# Altium PCB PCB1.PcbDoc
Units mm, origin at the board's own origin, x right, y up, seen from the top; angles counter-clockwise.
Board outline 30.4 x 31.22 mm, 2 copper layers (Top Layer, Bottom Layer); 47 components, 33 nets, 158 pads, 139 vias.
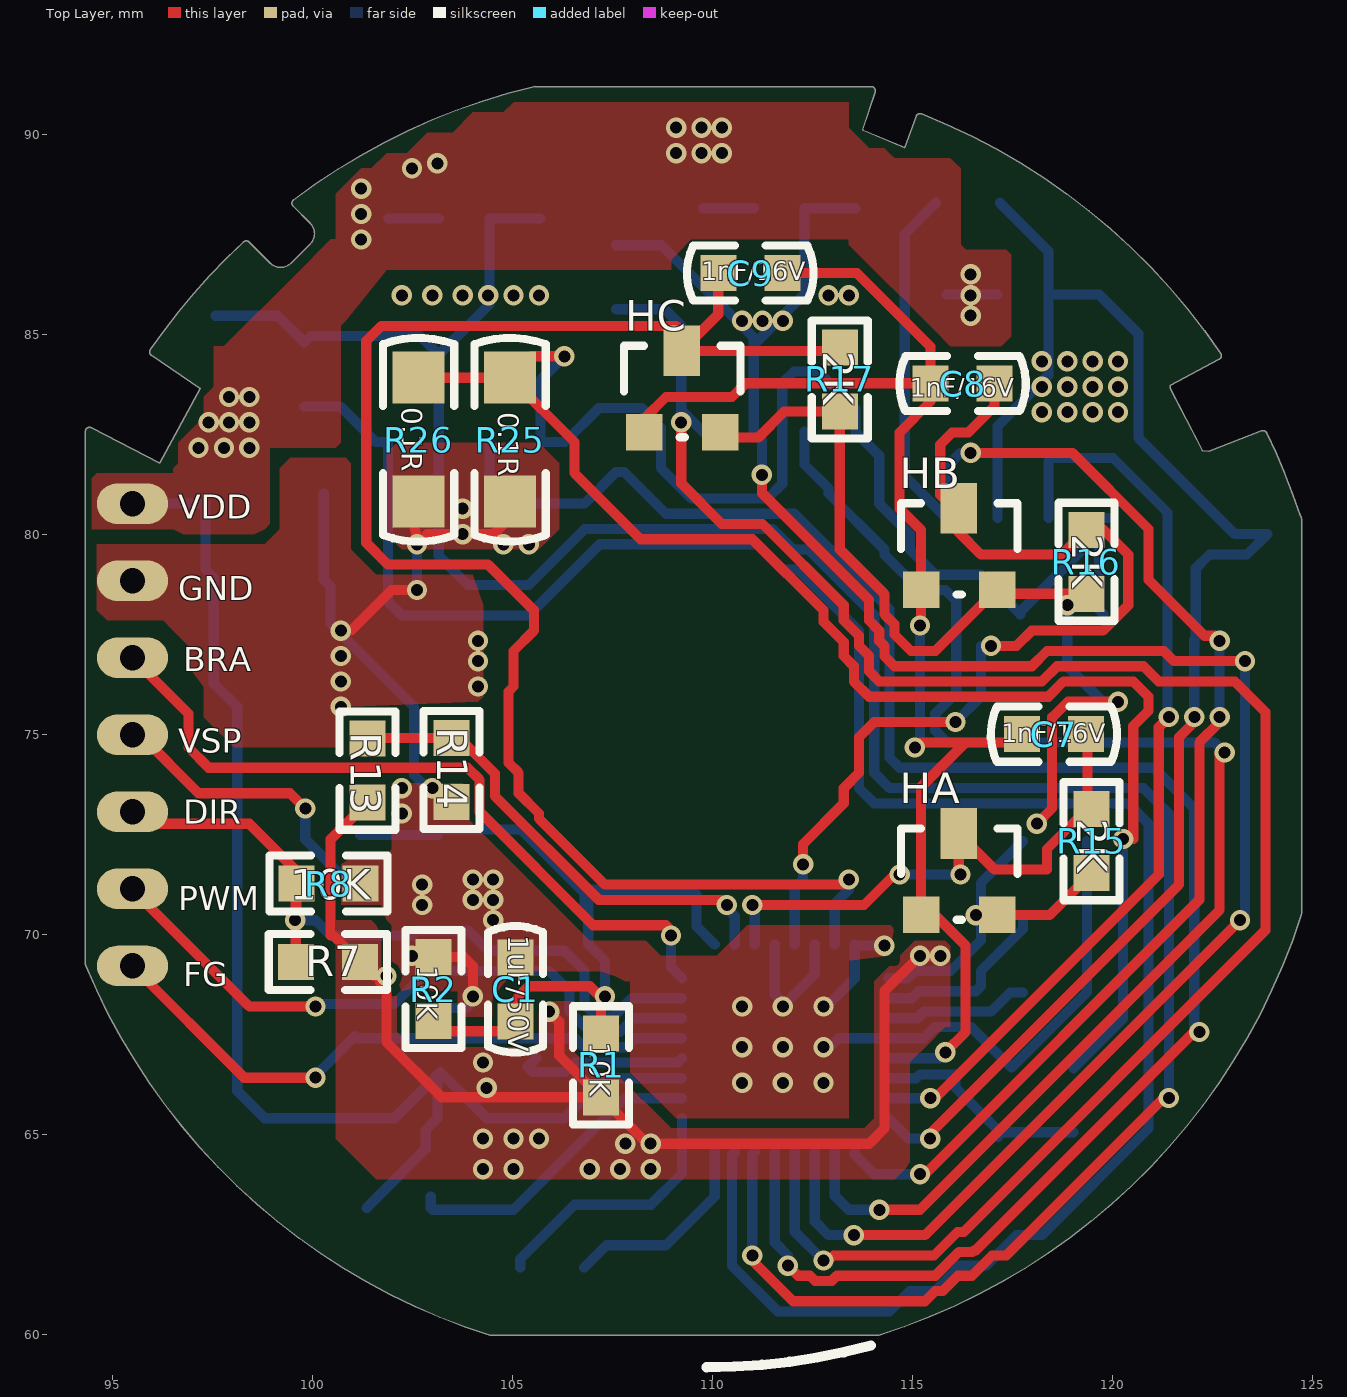
[diagram p0: Top Layer view]
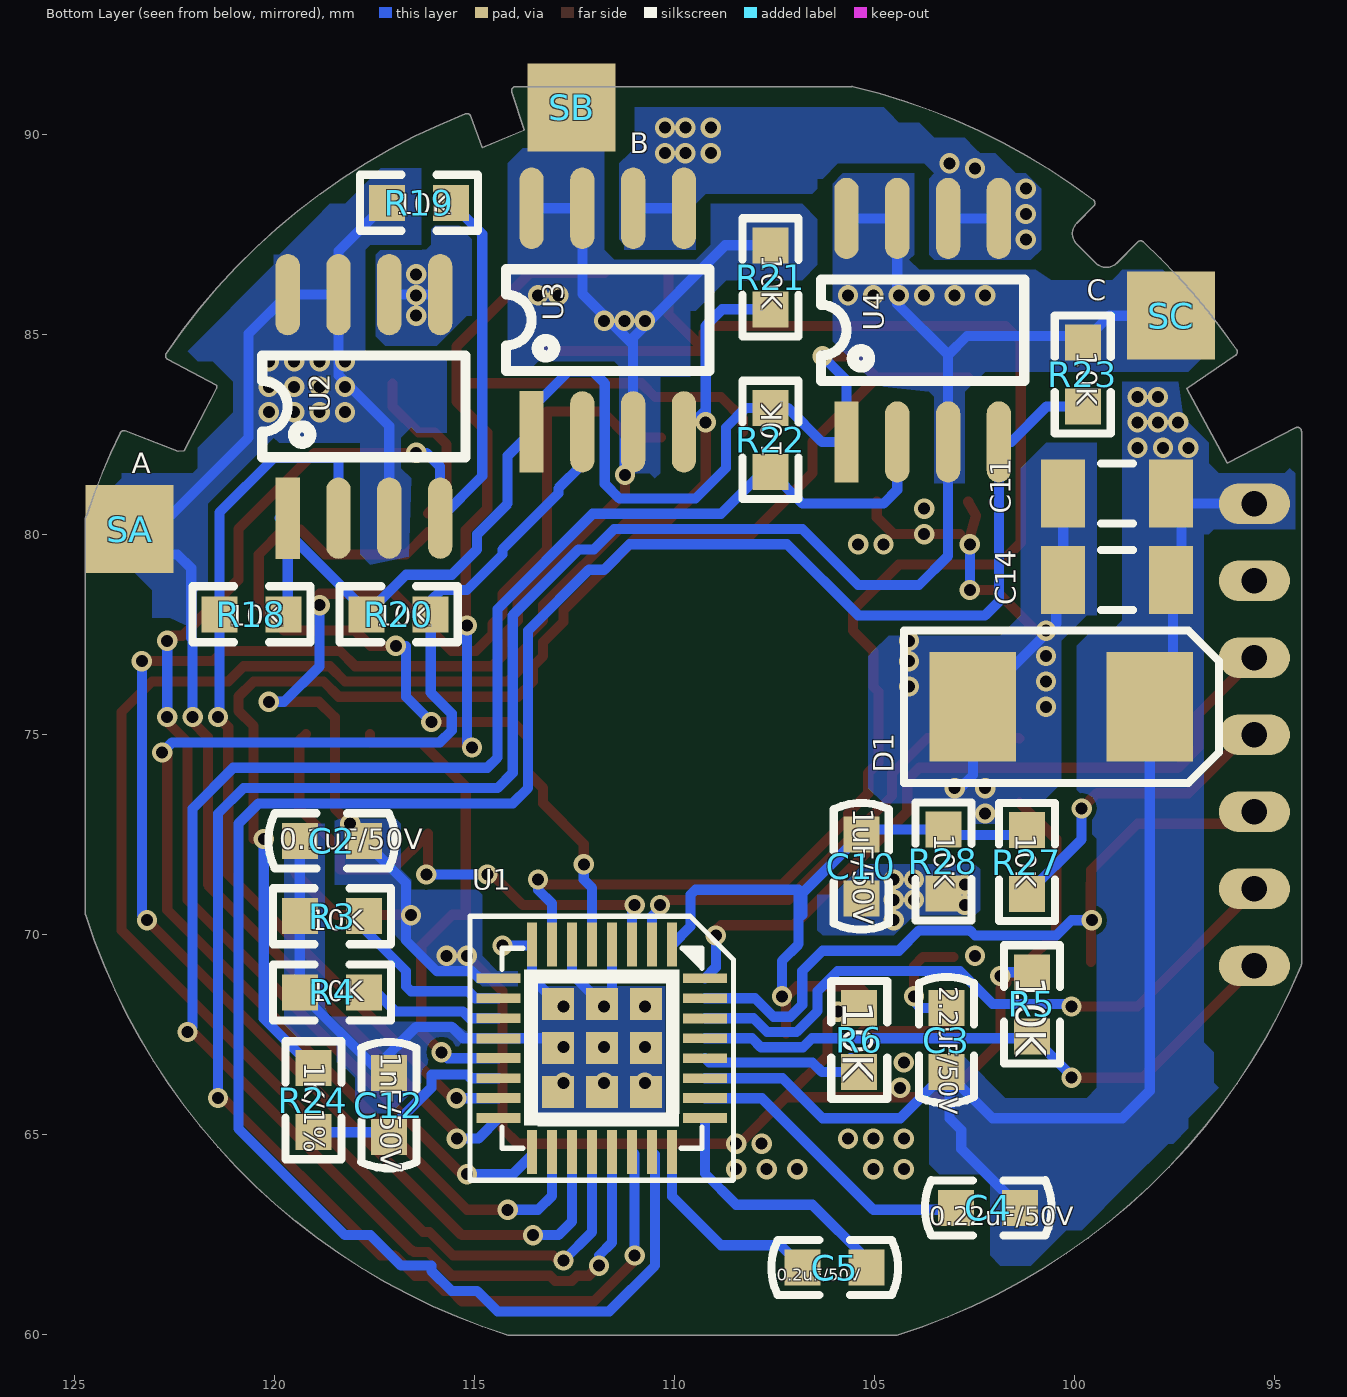
[diagram p1: Bottom Layer view, seen from below]

## Layer stack, top to bottom
Top Solder: solder mask 0.0102, Solder Resist, Dk 3.5
Top Layer: signal copper 0.0356
Dielectric 1: dielectric 0.32, FR-4, Dk 4.8
Bottom Layer: signal copper 0.0356
Bottom Solder: solder mask 0.0102, Solder Resist, Dk 3.5

## Board outline
94.333,69.224 cw(c94.428,69.263) 94.326,69.263 94.326,82.578 cw(c94.428,82.578) 94.475,82.669 94.474,82.669 94.475,82.669 96.186,81.785 97.199,83.648 95.975,84.48 cw(c96.032,84.564) 95.948,84.622 cw(c109.296,75.438) 98.276,87.315 cw(c98.345,87.24) 98.423,87.306 98.945,86.784 ccw(c98.873,86.712) 98.945,86.784 ccw(c99.206,87.044) 99.466,86.784 99.945,87.263 ccw(c100.017,87.191) 99.945,87.263 ccw(c99.685,87.523) 100.053,87.523 ccw(c99.685,87.523) 99.945,87.783 cw(c100.017,87.856) 99.945,87.784 99.945,87.783 99.518,88.211 cw(c99.59,88.283) 99.528,88.364 cw(c109.296,75.438) 105.538,91.198 cw(c105.562,91.099) 105.581,91.199 113.97,91.199 cw(c113.97,91.097) 114.072,91.097 cw(c113.97,91.097) 114.067,91.065 113.753,90.113 114.812,89.671 115.092,90.455 cw(c115.188,90.421) 115.226,90.516 cw(c109.296,75.438) 122.708,84.529 cw(c122.623,84.471) 122.725,84.471 cw(c122.623,84.471) 122.671,84.381 121.45,83.733 121.45,83.654 122.252,82.1 122.414,82.082 123.73,82.59 cw(c123.767,82.495) 123.859,82.54 cw(c109.296,75.438) 124.696,80.473 cw(c124.626,80.399) 124.728,80.399 124.728,70.518 ccw(c124.626,70.518) 124.728,70.52 124.728,70.518 cw(c124.626,70.518) 124.723,70.487 cw(c109.296,75.438) 114.164,59.985 cw(c114.133,60.082) 114.133,59.98 104.494,59.98 cw(c104.469,60.079) 104.439,59.981 cw(c109.296,75.438)

## Design rules (kind name [scope] priority, off if disabled: settings)
Clearance [All] p1: gap=0.127
PolygonConnect [All] p1: connectstyle=Direct reliefconductorwidth=0.254 reliefentries=4 polygonreliefangle="90 Angle" airgapwidth=0.254
RoutingVias [All] p1: holewidth=0.711 width=1.27 viastyle="Through Hole" minholewidth=0.711 minwidth=1.27 maxholewidth=0.711 maxwidth=1.27
SilkToSilkClearance [All] p1: silktosilkclearance=0.051
SolderMaskExpansion [All] p1: expansion=0.102
Width [All] p1: maxlimit=0.254 minlimit=0.254 preferedwidth=0.254
29 further rules are at their usual default settings.

## Components (designator, comment, footprint, x,y, rotation, side; value= is the part's Value field where it differs from the comment)
C1 "1uF/50V" C0603 101.981,68.326 r180 top
C2 "0.1uF/50V" C0603 118.872,75.438 r90 bottom
C3 "2.2uF/50V" C0603 106.299,67.056 r0 bottom
C4 "0.22uF/50V" C0603 101.854,60.071 r270 bottom
C5 "0.2uF/50V" C0603 106.299,64.77 r90 bottom
C7 "1nF/16V" C0603 118.237,78.105 r90 top
C8 "1nF/16V" C0603 115.951,86.868 r90 top
C9 "1nF/16V" C0603 111.252,83.439 r270 top
C10 "1uF/50V" C0603 102.235,72.009 r180 bottom
C11 "22uF/25V" C1206 98.933,81.026 r180 bottom
C12 "1nF/50V" C0603 114.046,66.04 r180 bottom
C14 "22uF/25V" C1206 98.933,78.867 r180 bottom
D1 "24V/Zener" SMB 100.33,75.692 r180 bottom
HA "HALL_SOT23-3" SOT-23 119.507,70.866 r0 top locked
HB "HALL_SOT23-3" SOT-23 119.507,78.994 r0 top locked
HC "HALL_SOT23-3" SOT-23 112.582,82.931 r0 top locked
R1 "10K" R0603 105.537,65.278 r180 top
R2 "10K" R0603 101.346,67.183 r180 top
R3 "10K" R0603 120.015,72.136 r90 bottom
R4 "10K" R0603 120.015,70.231 r90 bottom
R5 "10K" R0603 102.743,66.802 r0 bottom
R6 "10K" R0603 107.061,65.913 r0 bottom
R7 "" R0603 98.933,70.993 r90 top
R8 "10K" R0603 101.854,69.596 r270 top
R13 "" R0603 99.695,72.644 r180 top
R14 "" R0603 105.156,75.565 r0 top
R15 "2K" R0603 121.158,73.787 r0 top
R16 "2K" R0603 121.031,80.772 r0 top
R17 "2K" R0603 111.506,82.423 r180 top
R18 "10K" R0603 119.126,76.327 r270 bottom
R19 "10K" R0603 114.935,86.614 r270 bottom
R20 "10K" R0603 115.443,76.327 r270 bottom
R21 "10K" R0603 105.918,87.884 r180 bottom
R22 "10K" R0603 105.918,83.82 r180 bottom
R23 "10K" R0603 101.473,82.55 r0 bottom
R24 "1K/1%" R0603 117.348,67.31 r180 bottom
R25 "0.1R" R1206 107.188,82.296 r0 top
R26 "0.1R" R1206 104.902,82.296 r0 top
R27 "10K" R0603 102.87,70.358 r0 bottom
R28 "10K" R0603 101.6,73.279 r180 bottom
SA "" cp1 129.921,80.137 r0 top
SB "" cp1 118.872,90.678 r0 top
SC "" cp1 103.886,85.471 r0 top
U1 "SDC9270_QFN32" "QFN32 (5*5)" 111.887,72.39 r90 bottom
U2 "MOS" SOP-8 123.571,83.058 r0 bottom
U3 "MOS" SOP-8 117.475,85.217 r0 bottom
U4 "MOS" SOP-8 109.601,84.963 r0 bottom

## Footprints (in the part's own frame and the unit in brackets; to place one, negate y for a bottom-side part, rotate by r counter-clockwise, add the part's x,y. Pads: shape width x height; smd on the part's side, far side on the other; paste and mask are expansions set on the pad)
C0603 [mm]
  rect 0.9x0.9 smd: 1(-3.096,0.496) 2(-3.096,-1.104)
  silkscreen extent -3.78,-1.88 -2.41,1.28
C1206 [mm] "Chip Capacitor, Body 3.2x1.6mm, IPC High Density"
  rect 1.1x1.7 smd: 1(-1.35,0) 2(1.35,0)
  silkscreen extent -0.4,-0.75 0.4,0.75, body extent -1.7,-0.9 1.7,0.9, height 1.3
cp1 [mm]
  rect 2.2x2.2 smd far side: 1(-6.3,0)
"QFN32 (5*5)" [mm]
  rect 1.1x0.25 smd: 1(-2.643,-1.828) 2(-2.643,-1.328) 3(-2.643,-0.828) 4(-2.643,-0.328) 5(-2.643,0.172) 6(-2.643,0.672) 7(-2.643,1.172) 8(-2.643,1.672) 17(-7.823,1.672) 18(-7.823,1.172) 19(-7.823,0.672) 20(-7.823,0.172) 21(-7.823,-0.328) 22(-7.823,-0.828) 23(-7.823,-1.328) 24(-7.823,-1.828)
  rect 0.25x1.1 smd: 9(-3.483,2.512) 10(-3.983,2.512) 11(-4.483,2.512) 12(-4.983,2.512) 13(-5.483,2.512) 14(-5.983,2.512) 15(-6.483,2.512) 16(-6.983,2.512) 25(-6.983,-2.648) 26(-6.483,-2.648) 27(-5.983,-2.648) 28(-5.483,-2.648) 29(-4.983,-2.648) 30(-4.483,-2.648) 31(-3.983,-2.648) 32(-3.483,-2.648)
  rect 0.8x0.8 smd: 33(-6.333,-1.178) 33(-6.333,-0.078) 33(-6.333,1.022) 33(-5.233,-1.178) 33(-5.233,-0.078) 33(-5.233,1.022) 33(-4.133,-1.178) 33(-4.133,-0.078) 33(-4.133,1.022)
  silkscreen extent -8.53,-3.36 -1.93,3.22
R0603 [mm]
  rect 0.9x0.9 smd: 1(-1.679,-0.653) 2(-1.679,-2.253)
  silkscreen extent -2.38,-2.93 -0.98,0.02
R1206 [mm]
  rect 1.3x1.3 smd: 1(-2.244,-1.475) 2(-2.244,1.625)
  silkscreen extent -3.13,-2.47 -1.35,2.62
SMB [mm]
  rect 2.159x2.743 smd: 1(-2.21,0) 2(2.21,0)
  silkscreen extent -3.94,-1.91 3.94,1.91
SOP-8 [mil]
  rect 24x80 smd: 1(-153.56,104.3)
  oval 24x80 smd: 2(-203.56,104.3) 3(-253.56,104.3) 4(-303.56,104.3) 5(-303.56,-115.7) 6(-253.56,-115.7) 7(-203.56,-115.7) 8(-153.56,-115.7)
  silkscreen extent -329,-56 -129,44
SOT-23 [mil]
  rect 36x36 smd: 1(-93.79,-14.61) 3(-168.79,-14.61)
  rect 36x50 smd: 2(-131.79,65.39)
  silkscreen extent -189,-20 -74,70

## Part data
C1 C7 C8 C9 C10 C11 C12 C14: library part C0603, "C0603"
C2 C4 C5: library part C0805, "C0805"
C3: library part C1206, "C1206"
D1: library part Zener_SOD-123, "Zener Diode"
R1 R2 R3 R4 R5 R6 R7 R8 R13 R14 R15 R16 R17 R24 R27 R28: library part R0603, "R0603"
R18 R19 R20 R21 R22 R23: library part R1_0603
R25 R26: library part R2512
SA SB SC: library part CON1, "Connector"

## Free pads (board coordinates)
  oval 1.778x1.016 hole 0.635: 1(95.504,69.215) 1(95.504,71.141) 1(95.504,73.067) 1(95.504,74.993) 1(95.504,76.92) 1(95.504,78.846) 1(95.504,80.772)

## Via types
v1: diameter 0.508, hole 0.3, Top Layer to Bottom Layer, 139 vias

## Nets (pads, with @x,y where several pads share a name; then routed paths per layer and width w, separated by ;. In a path a pad name is that pad's centre, name@x,y a point inside that pad or via, vN(x,y) a via of type N, cw(c..) or ccw(c..) an arc to the next point about the centre after c; other vN are vias at no path point)
BRAKE: pad.1@95.504,76.92 U1.32 | length 18.6
  Top Layer w0.254: pad.1@95.504,76.92 96.901,75.523 96.901,74.676 97.409,74.168 103.88,74.168 104.181,73.867 104.181,73.067 107.017,70.231 108.839,70.231 108.966,70.104 v1(108.966,69.977)
  Bottom Layer w0.254: v1(108.966,69.977) 108.966,69.18 U1.32
CP1: C5.1 U1.24 | length 5.1
  Bottom Layer w0.254: C5.1 107.351,62.23 108.839,62.23 110.059,63.45 U1.24
CP2: C5.2 U1.25 | length 6.5
  Bottom Layer w0.254: C5.2 105.195,61.888 106.553,63.246 108.458,63.246 109.239,64.027 U1.25
DIR: pad.1@95.504,73.067 R7.1 R8.2 U1.31 | length 19.4
  Top Layer w0.254: pad.1@95.504,73.067 95.8,72.771 98.425,72.771 99.586,71.61 R7.1 ; v1(99.568,70.358) 99.601,70.391 R8.2
  Bottom Layer w0.254: v1(99.568,70.358) 100.076,70.358 100.457,69.977 102.489,69.977 102.616,70.104 103.886,70.104 104.394,69.596 106.299,69.596 106.807,69.088 106.807,68.243 107.105,67.945 107.525,67.945 107.987,68.407 U1.31
FG: pad.1@95.504,69.215 R5.1 U1.29 | length 15.6
  Top Layer w0.254: pad.1@95.504,69.215 98.298,66.421 v1(100.076,66.421)
  Bottom Layer w0.254: v1(100.076,66.421) 100.076,66.467 R5.1 101.112,67.407 106.565,67.407 106.789,67.183 107.841,67.183 108.065,67.407 U1.29
GHA: R19.1 U1.17 U2.4 | length 38
  Top Layer w0.254: v1(115.189,64.008) 115.316,64.008 122.174,70.866 122.174,74.803 122.682,75.311 v1(122.682,75.438) ; v1(116.459,82.042) 118.999,82.042 120.904,80.137 120.904,78.867 122.301,77.47 122.555,77.47 v1(122.682,77.343)
  Bottom Layer w0.254: U1.17 113.559,64.495 114.046,64.008 v1(115.189,64.008) ; R19.1 114.808,87.513 114.808,81.461 U2.4 115.86,81.697 116.205,82.042 v1(116.459,82.042) ; v1(122.682,75.438) v1(122.682,77.343)
GHB: R21.2 U1.20 U3.4 | length 47.3
  Top Layer w0.254: v1(109.22,82.804) 109.22,81.28 110.236,80.264 111.252,80.264 113.284,78.232 113.284,77.851 113.665,77.47 113.665,77.216 113.919,76.962 113.919,76.581 114.173,76.327 118.237,76.327 118.618,76.708 120.777,76.708 121.158,76.327 123.063,76.327 123.825,75.565 123.825,70.104 116.284,62.563 116.126,62.563 115.539,61.976 113.03,61.976 v1@112.903,61.849 ; v1@112.649,61.849 v1(112.776,61.849)
  Bottom Layer w0.254: R21.2 108.806,85.631 109.22,85.217 109.22,83.112 ; v1(109.22,82.804) 109.22,83.112 ; U3.4 109.22,83.112 ; U1.20 112.059,62.566 v1(112.776,61.849)
GHC: R23.1 U1.23 U4.4 | length 54.9
  Bottom Layer w0.254: R23.1 100.693,83.203 101.582,82.314 U4.4 101.89,78.323 102.235,77.978 105.41,77.978 107.188,79.756 111.125,79.756 111.76,79.121 112.141,79.121 113.665,77.597 113.665,73.66 114.046,73.279 120.396,73.279 120.904,72.771 120.904,65.151 118.237,62.484 117.602,62.484 116.84,61.722 116.078,61.722 116.078,61.595 115.57,61.087 114.935,61.087 114.427,60.579 111.633,60.579 110.49,61.722 110.49,64.498 U1.23
GLA: R18.2 U1.15 U2.2 | length 23.3
  Top Layer w0.254: v1(115.449,65.907) 115.564,65.907 121.158,71.501 121.158,75.184 v1(121.412,75.438)
  Bottom Layer w0.254: U1.15 v1(115.449,65.907) ; U2.2 118.4,81.824 118.491,81.915 120.015,81.915 121.379,80.551 R18.2 v1@121.379,75.344
GLB: R20.1 U1.18 U3.2 | length 35.1
  Top Layer w0.254: v1(114.173,63.119) 115.189,63.119 122.682,70.612 122.682,74.549 v1(122.809,74.549)
  Bottom Layer w0.254: U3.2 112.304,81.752 112.903,81.153 112.903,81.026 114.3,79.629 114.3,79.502 115.189,78.613 115.824,78.613 116.096,78.341 R20.1 116.096,76.047 115.57,75.521 115.57,75.101 115.868,74.803 122.555,74.803 v1(122.809,74.549) ; U1.18 113.059,63.471 113.411,63.119 v1(114.173,63.119)
GLC: R22.2 U1.21 U4.2 | length 46.8
  Top Layer w0.254: v1(111.887,61.722) 112.141,61.468 112.439,61.468 112.566,61.341 112.986,61.341 113.113,61.468 115.57,61.468 116.163,62.061 116.506,62.061 116.548,62.103 116.586,62.103 122.174,67.691 v1(122.174,67.564)
  Bottom Layer w0.254: U4.2 104.43,81.117 104.775,80.772 106.802,80.772 R22.2 107.79,81.567 108.839,80.518 112.045,80.518 114.427,78.136 114.427,74.422 114.681,74.168 121.031,74.168 122.047,73.152 122.047,67.691 v1(122.174,67.564) ; U1.21 111.559,62.304 111.887,61.976 v1(111.887,61.722)
GND: 
HA: C7.2 HA.2 R15.1 U1.3 | length 13.8
  Top Layer w0.254: v1@111.125,70.739 113.792,70.739 114.554,71.501 v1(114.681,71.501) ; v1@116.159,71.547 HA.2@116.159,72.518 ; HA.2 HA.2@116.159,72.518 ; C7.2@119.214,75.009 119.38,74.843 119.38,73.152 118.364,72.136 118.364,71.628 117.049,71.628 HA.2@116.159,72.518
  Bottom Layer w0.254: v1(110.998,70.739) 111.059,70.678 U1.3 ; v1(114.681,71.501) v1(116.205,71.501)
HB: C8.2 HB.2 R16.1 U1.5 | length 24.9
  Top Layer w0.254: v1(112.268,71.755) 112.268,72.263 113.284,73.279 113.284,73.66 113.665,74.041 113.665,74.93 114.046,75.311 v1(116.078,75.311) ; HB.2@116.159,80.056 116.713,79.502 118.735,79.502 R16.1 119.779,80.119 120.396,79.502 120.396,78.232 119.761,77.597 117.983,77.597 117.602,77.216 v1(116.967,77.216) ; HB.2@116.159,80.528 115.697,80.99 115.697,82.252 115.995,82.55 116.398,82.55 117.055,83.207 C8.2
  Bottom Layer w0.254: U1.5 112.059,71.165 112.268,71.374 v1(112.268,71.755) ; v1(116.078,75.311) 116.713,75.946 v1@116.713,77.216
HC: C9.2 HC.2 R17.2 U1.7 | length 40.8
  Top Layer w0.254: C9.2 110.148,85.506 HC.2@109.273,84.631 ; R17.2 113.101,84.592 HC.2 HC.2@109.273,84.631 ; v1(113.411,71.374) 113.284,71.247 107.315,71.247 105.664,72.898 105.664,73.025 105.156,73.533 105.156,74.041 104.902,74.295 104.902,76.073 105.029,76.2 105.029,77.089 105.537,77.597 105.537,78.105 104.394,79.248 101.89,79.248 101.346,79.792 101.346,84.836 101.727,85.217 109.093,85.217 109.273,85.037 HC.2@109.273,84.631
  Bottom Layer w0.254: U1.7 113.059,70.768 113.411,71.12 v1(113.411,71.374)
ILIMIT: C12.2 R24.2 U1.14 | length 5.5
  Bottom Layer w0.254: U1.14 115.091,66.407 115.189,66.504 116.078,66.504 116.078,66.167 117.142,65.103 C12.2 ; C12.2@117.262,65.057 R24.2
ISENSE: R18.1 R20.2 R22.1 R24.1 R25.2 R26.2 U2.1 U3.1 U4.1 | length 63
  Top Layer w0.254: R26.2 R25.2 ; v1(106.299,84.455) 105.478,84.455 R25.2 ; v1(120.269,72.39) 120.523,72.39 120.523,75.215 120.904,75.596 120.904,75.946 120.523,76.327 118.776,76.327 118.395,75.946 113.919,75.946 113.538,76.327 113.538,76.708 113.284,76.962 113.284,77.312 112.776,77.82 112.776,78.105 110.998,79.883 108.204,79.883 106.553,81.534 106.553,82.312 R25.2
  Bottom Layer w0.254: v1(106.299,84.455) 105.7,83.856 U4.1 106.317,82.314 107.17,83.167 R22.1 108.222,83.167 108.712,82.677 108.712,81.661 109.474,80.899 111.379,80.899 111.746,81.266 111.746,83.779 112.041,84.074 112.649,84.074 113.574,83.149 U3.1 114.173,81.969 114.173,80.772 114.935,80.01 114.935,79.629 115.57,78.994 116.713,78.994 R20.2@117.696,78.011 ; R20.2 R20.2@117.696,78.011 ; R24.1 120.269,67.899 v1(120.269,72.39) ; R18.1 119.67,78.115 U2.1@119.67,80.046 ; U2.1@119.87,80.409 U2.1 U2.1@119.67,80.046 ; R20.2@117.696,78.011 117.696,78.072 U2.1@119.67,80.046
LEAD: R13.2 R14.1 U1.2 | length 12.1
  Top Layer w0.254: R13.2 101.389,74.912 R14.1 103.675,74.912 104.562,74.025 104.562,73.461 107.157,70.866 110.236,70.866 v1(110.363,70.739)
  Bottom Layer w0.254: v1(110.363,70.739) 110.363,70.656 110.559,70.46 U1.2
MODE: R3.2 U1.10 | length 4.6
  Bottom Layer w0.254: U1.10 114.985,68.407 115.159,68.58 116.586,68.58 116.713,68.707 116.713,69.088 117.762,70.137 R3.2
NetP1_3: pad.1@95.504,74.993 R27.1 | length 7.8
  Top Layer w0.254: pad.1@95.504,74.993 95.695,74.993 97.155,73.533 99.441,73.533 v1(99.822,73.152)
  Bottom Layer w0.254: v1(99.822,73.152) 99.822,72.38 R27.1
NFLT: R6.1 U1.28 | length 4.4
  Bottom Layer w0.254: R6.1@105.596,66.907 105.382,66.693 105.509,66.566 106.317,66.566 106.553,66.802 109.134,66.802 U1.28
PGND: C7.1 C8.1 C9.1 HA.3 HB.3 HC.3 U1.13 | length 36.3
  Top Layer w0.254: HC.3 108.295,82.895 108.839,83.439 110.49,83.439 110.831,83.78 C8.1@115.455,83.78 ; C9.1 113.617,86.535 115.455,84.697 C8.1@115.455,83.78 ; v1(115.062,74.676) 115.189,74.803 116.332,74.803 ; v1@115.22,77.755 HB.3 115.22,80.106 114.681,80.645 114.681,82.55 115.455,83.324 C8.1 C8.1@115.455,83.78 ; v1(115.824,67.056) 116.332,67.564 116.332,69.723 115.56,70.495 HA.3 115.22,73.691 116.332,74.803 ; C7.1@117.614,75.009 117.614,74.803 116.332,74.803
  Bottom Layer w0.254: U1.13 115.675,66.907 v1(115.824,67.056) ; v1(115.062,74.676) 115.189,74.803 v1(115.189,77.724)
PWM: pad.1@95.504,71.141 U1.30 | length 16.4
  Top Layer w0.254: pad.1@95.504,71.141 95.504,71.12 98.425,68.199 v1(100.076,68.199)
  Bottom Layer w0.254: v1(100.076,68.199) 100.141,68.264 102.046,68.264 102.87,69.088 105.918,69.088 106.426,68.58 106.426,68.085 106.947,67.564 107.683,67.564 108.026,67.907 U1.30
PWMIN: 
SA: R19.2 SA.1 U1.16 U2.3 U2.7 U2.8 | length 39
  Top Layer w0.254: v1(115.443,64.897) 115.316,64.897 121.666,71.247 121.666,74.93 122.047,75.311 v1(122.047,75.438)
  Bottom Layer w0.254: U1.16 114.909,64.897 v1(115.443,64.897) ; U2.3 117.13,82.713 118.4,83.983 U2.7 ; R19.2 118.4,87.081 U2.7 ; v1(122.047,75.438) 122.047,77.379 122.083,77.415 122.083,79.157 122.428,79.502 123.367,79.502 123.875,80.01 123.063,80.01 120.65,82.423 120.65,85.017 U2.8 U2.7
  other v1: 118.237,83.058 118.872,83.058 119.507,83.058 120.142,83.058 118.237,83.693 118.872,83.693 119.507,83.693 120.142,83.693 118.237,84.328 118.872,84.328 119.507,84.328 120.142,84.328
SB: R21.1 SB.1 U1.19 U3.3 U3.7 U3.8 | length 50.6
  Top Layer w0.254: v1(111.238,81.494) 111.238,81.04 113.919,78.359 113.919,77.851 114.173,77.597 114.173,77.343 114.3,77.216 114.3,76.962 114.554,76.708 117.983,76.708 118.364,77.089 121.285,77.089 121.539,76.835 v1(123.317,76.835) ; v1(113.538,62.484) 115.316,62.484 v1(123.19,70.358)
  Bottom Layer w0.254: R21.1 108.73,87.231 111.034,84.927 111.034,84.745 ; v1(111.238,81.494) 111.238,82.365 U3.3 111.034,84.745 ; U1.19 112.559,62.828 112.903,62.484 v1(113.538,62.484) ; U3.8 U3.7 112.304,86.015 111.034,84.745 ; v1(123.19,70.358) 123.317,70.485 v1(123.317,76.835)
  other v1: 110.744,85.344 111.252,85.344 111.76,85.344 112.903,85.979 113.411,85.979
SC: R23.2 SC.1 U1.22 U4.3 U4.7 U4.8 | length 63.7
  Top Layer w0.254: v1(110.998,61.976) 110.998,61.849 112.014,60.833 115.316,60.833 115.57,61.087 115.759,61.087 116.14,61.468 116.49,61.468 116.998,61.976 117.348,61.976 121.412,66.04 v1(121.412,65.913)
  Bottom Layer w0.254: SC.1 99.126,85.471 R23.2 99.954,84.963 102.689,84.963 103.16,84.491 ; U4.8 U4.7 104.43,85.761 103.16,84.491 ; v1(110.998,61.976) 110.998,64.506 U1.22 ; v1(121.412,65.913) 121.412,73.025 120.777,73.66 114.427,73.66 114.046,74.041 114.046,77.978 112.395,79.629 112.014,79.629 111.506,80.137 106.807,80.137 105.41,78.74 103.886,78.74 103.16,79.466 U4.3 103.16,84.491
  other v1: 102.235,85.979 102.997,85.979 103.759,85.979 104.394,85.979 105.029,85.979 105.664,85.979
SGND: C1.2 C2.1 C3.2 C10.2 C11.1 C12.1 C14.1 D1.1 pad.1@95.504,78.846 R2.2 R3.1 R4.1 R8.1 R14.2 R25.1 R26.1 R28.2 U1.4 U1.6 U1.8 U1.12 U1.33 | length 36.2
  Top Layer w0.254: v1(100.711,77.597) 100.965,77.597 101.981,78.613 v1(102.616,78.613) ; v1(102.616,79.756) 102.658,79.798 102.466,80.477 R26.1 ; 102.87,80.01 v1(103.759,80.01) 104.521,80.01 104.944,80.433 R25.1 ; R2.2 103.792,69.436 104.013,69.215 v1(104.013,68.453)
  Bottom Layer w0.254: C11.1 C14.1 100.457,78.693 100.457,77.775 D1.1 102.54,73.99 102.87,73.66 v1(102.997,73.66) ; v1(102.616,78.613) v1(102.616,79.756) ; C3.2 103.847,68.16 104.013,68.326 v1(104.013,68.453) ; U1.4 111.559,68.507 111.809,68.257 112.559,69.007 U1.6 ; U1.33@112.909,67.157 113.159,67.407 U1.12 115.286,67.407 115.57,67.691 116.459,67.691 117.475,66.675 117.485,66.675 R4.1 ; U1.33@112.909,68.257 113.559,68.907 U1.8 113.583,69.723 v1(114.3,69.723) ; R4.1@119.368,68.558 C2.1
  other v1: 110.744,66.294 111.76,66.294 112.776,66.294 110.744,67.183 111.76,67.183 112.776,67.183 110.744,68.199 111.76,68.199 112.776,68.199 102.489,69.469 104.521,70.358 102.743,70.739 104.013,70.866 104.521,70.866 102.743,71.247 104.013,71.374 104.521,71.374 102.235,73.025 102.235,73.66 100.711,75.692 104.14,76.2 100.711,76.327 104.14,76.835 100.711,76.962 104.14,77.343 104.775,79.756 105.41,79.756 103.759,80.645
SREF: C1.1 C10.1 R1.2 R2.1 R27.2 R28.1 U1.1 | length 20.1
  Top Layer w0.254: R2.1@102.898,67.582 C1.1@105.301,67.582 ; C1.1 105.077,68.374 105.41,68.707 106.934,68.707 107.188,68.453 v1(107.315,68.453) 107.216,68.354 R1.2
  Bottom Layer w0.254: R27.2@101.191,72.484 R28.1@103.137,72.484 ; R28.1 105.21,72.626 C10.1 106.807,71.029 106.807,70.485 ; v1(107.315,68.453) 107.315,69.342 106.898,69.759 106.898,71.12 109.474,71.12 109.601,70.993 109.601,70.205 U1.1
TEST: R4.2 U1.11 | length 3.6
  Bottom Layer w0.254: U1.11 115.12,67.907 115.285,68.072 116.967,68.072 117.447,68.552 R4.2
VCP: C4.2 U1.26 | length 7.7
  Bottom Layer w0.254: C4.2@102.958,63.452 C4.2 103.005,63.119 105.029,63.119 107.817,65.907 U1.26
VDD: C3.1 C4.1 C11.2 C14.2 D1.2 pad.1@95.504,80.772 U1.27 U2.5 U2.6 U3.5 U3.6 U4.5 U4.6 | length 37.5
  Bottom Layer w0.254: pad.1@95.504,80.772 97.329,80.772 97.329,79.121 97.536,78.914 97.536,76.276 D1.2 98.12,66.091 98.806,65.405 102.049,65.405 C3.1@103.124,66.48 ; C4.1 102.834,64.643 102.834,65.115 103.124,65.405 C3.1@103.124,66.48 ; U4.5 U4.6 ; U1.27 107.301,66.407 106.299,65.405 104.358,65.405 C3.1 C3.1@103.124,66.48 ; U3.5 U3.6 ; U2.5 U2.6
  other v1: 97.155,82.169 97.79,82.169 98.425,82.169 97.409,82.804 97.917,82.804 98.425,82.804 97.917,83.439 98.425,83.439 116.459,85.471 116.459,85.979 116.459,86.505 101.219,87.376 101.219,88.011 101.219,88.646 102.489,89.154 103.124,89.281 109.093,89.535 109.728,89.535 110.236,89.535 109.093,90.17 109.728,90.17 110.236,90.17
VREF: C2.2 HA.1 HB.1 HC.1 R1.1 R5.2 R6.2 R7.2 R13.1 R15.2 R16.2 R17.1 U1.9 | length 60.6
  Top Layer w0.254: R13.1 100.457,72.38 100.457,69.977 100.523,69.977 R7.2 101.539,68.961 v1(101.854,68.961) ; v1@101.696,68.803 101.854,68.646 101.854,67.31 103.233,65.931 R1.1 ; v1(105.918,68.072) 106.172,67.818 106.172,66.975 R1.1 ; HC.1@110.337,82.423 111.146,82.423 111.799,83.076 R17.1 113.185,79.632 114.3,78.517 114.3,78.009 114.554,77.755 114.554,77.501 114.966,77.089 115.57,77.089 HB.1@117.104,78.623 ; v1(115.697,69.469) v1(115.189,69.469) 114.3,68.58 114.3,65.151 113.919,64.77 108.377,64.77 R1.1 ; v1@116.596,70.495 HA.1 ; HA.1@117.135,70.485 118.43,70.485 R15.2 ; HB.1@117.229,78.519 118.872,78.519 ; v1(118.11,72.771) 118.491,73.152 118.491,75.438 118.51,75.438 118.891,75.819 v1(120.142,75.819) ; v1(118.872,78.232) R16.2@119.065,78.232
  Bottom Layer w0.254: R5.2 101.76,69.055 v1(101.854,68.961) ; U1.9 114.881,68.907 115.062,69.088 115.951,69.088 116.713,69.85 116.713,71.287 C2.2 ; v1(118.872,78.232) 118.872,76.708 119.761,75.819 v1(120.142,75.819)
  other v1: 104.267,64.135 105.029,64.135 106.934,64.135 107.696,64.135 108.458,64.135 107.823,64.77 108.458,64.77 104.267,64.897 105.029,64.897 105.664,64.897 104.358,66.167 104.267,66.802 116.586,70.485

## Polygon pours and split planes (outlines as drawn)
SGND on Bottom Layer "SGND" (solid, remove dead copper, pour order 35): 119.507,72.771 119.761,72.771 119.761,67.564 119.761,67.437 119.126,66.802 118.364,66.802 117.602,66.04 117.983,66.421 117.983,65.278 117.983,65.532 117.094,65.532 116.332,66.294 116.205,66.675 115.189,67.183 115.316,67.31 115.189,67.31 115.189,67.564 115.57,67.818 115.951,67.818 117.094,67.818 117.348,67.945 118.618,67.945 118.745,68.199 118.745,72.263 118.745,72.771
VDD on Bottom Layer "VDD" (solid, remove dead copper, pour order 34): 117.348,87.122 117.475,86.995 117.475,84.836 117.475,84.963 117.221,84.709 115.951,84.709 115.189,85.471 115.062,85.471 115.062,87.376 115.316,87.63 115.316,87.757 115.951,87.757 116.078,87.63 116.078,87.503 116.078,87.249 116.205,87.122 117.348,87.122
SA on Bottom Layer "SA" (solid, remove dead copper, pour order 2): 116.332,89.154 117.348,89.154 117.729,88.773 118.237,88.265 118.491,88.265 118.618,88.265 118.999,87.884 119.888,86.995 120.015,86.995 120.015,86.741 122.174,84.582 121.92,84.328 121.539,84.328 121.158,83.947 121.031,83.82 121.031,83.312 121.031,83.058 121.539,82.55 121.92,82.169 121.92,81.915 121.92,81.661 122.047,81.534 123.825,81.534 123.825,81.407 124.079,81.153 124.46,80.772 124.46,79.121 123.571,79.121 123.19,78.74 123.063,78.613 123.063,77.914 122.618,77.914 121.92,77.597 121.92,78.613 121.666,78.74 121.666,80.772 120.015,82.423 119.888,82.296 117.856,82.296 117.856,79.502 117.602,79.248 116.649,79.438 116.586,81.407 116.84,81.661 116.84,82.423 116.586,82.677 116.459,82.55 115.697,82.55 115.697,84.328 115.951,84.582 117.729,84.582 117.729,87.122 117.602,87.249 116.332,87.249
SB on Bottom Layer "SB" (solid, remove dead copper, pour order 6): 113.538,90.932 113.538,89.662 113.792,89.662 114.173,89.281 114.173,84.201 113.538,84.201 113.411,84.328 111.506,84.328 111.379,84.201 111.379,81.534 110.617,81.534 110.49,81.407 110.363,81.534 110.363,83.947 109.601,83.947 109.601,85.598 109.474,85.598 109.093,85.979 108.712,86.36 106.807,86.36 106.426,86.741 106.426,87.884 106.807,88.265 108.839,88.265 109.093,88.265 109.093,87.63 109.093,87.249 109.347,86.995 109.474,86.868 109.728,86.868 111.506,86.868 111.633,86.995 111.76,87.122 111.76,87.249 111.76,91.059 113.538,91.059 113.665,90.932
SC on Bottom Layer "SC" (solid, remove dead copper, pour order 8): 105.791,89.027 106.045,88.773 106.045,84.836 105.918,84.709 105.029,83.82 104.775,83.693 103.632,83.566 103.505,83.439 103.505,81.28 102.743,81.28 102.743,83.566 102.362,83.947 102.235,84.074 99.441,84.074 97.155,84.074 96.52,84.709 96.774,84.963 96.774,85.217 96.774,85.598 97.79,86.614 98.298,86.614 98.806,86.614 98.933,86.487 99.06,86.36 99.695,86.36 100.584,86.36 100.965,86.614 101.092,86.614 103.886,86.614 104.14,86.868 104.013,86.995 104.013,89.027
VDD on Bottom Layer "VDD" (solid, remove dead copper, pour order 10): 111.252,87.122 111.252,87.249 111.379,87.376 111.379,89.281 111.125,89.535 110.998,89.662 110.998,90.678 105.664,90.678 105.537,90.678 105.41,90.678 105.156,90.678 104.775,90.678 104.648,90.551 104.394,90.297 104.013,90.297 103.886,90.297 103.505,89.916 102.997,89.916 102.743,89.916 102.489,89.662 102.362,89.535 102.235,89.535 101.981,89.535 101.854,89.408 101.473,89.027 101.219,89.027 100.838,88.646 100.838,87.376 100.838,87.122 101.092,86.868 101.346,86.868 103.505,86.868 103.632,86.995 103.632,87.249 103.632,88.9 103.505,89.027 103.759,89.281 103.886,89.281 105.918,89.281 106.299,88.9 106.426,88.9 106.426,88.646 106.553,88.519 109.093,88.519 109.22,88.519 109.347,88.392 109.474,88.265 109.474,87.122
VDD on Bottom Layer "VDD" (solid, remove dead copper, pour order 12): 98.806,83.82 98.806,77.851 99.06,77.597 99.314,77.597 99.568,77.597 99.949,77.216 99.949,73.66 99.949,72.898 99.568,72.517 99.441,72.39 99.441,72.009 99.441,66.167 99.695,65.913 101.346,65.913 101.727,65.913 102.743,66.929 103.632,66.929 103.632,64.262 103.378,64.008 102.362,64.008 102.108,63.754 102.108,62.611 102.108,61.976 101.854,61.722 101.346,61.722 101.092,61.722 100.203,62.611 99.822,62.611 98.679,63.754 97.663,64.77 97.536,64.77 97.155,65.151 97.155,65.278 97.155,65.405 96.393,66.167 96.52,66.294 96.52,66.929 96.52,67.056 96.647,67.183 96.774,67.31 96.774,80.01 96.647,80.01 96.52,80.137 94.488,80.137 94.488,81.534 94.615,81.661 94.742,81.534 96.393,81.534 96.647,81.788 96.647,82.169 96.647,82.296 97.028,82.677 97.282,82.931 97.409,83.82
SGND on Bottom Layer "SGND" (solid, remove dead copper, pour order 20): 113.359,68.707 113.411,68.655 113.411,65.532 110.236,65.532 110.236,68.707 111.76,68.707 113.359,68.707 113.411,68.759
SGND on Bottom Layer "SGND" (solid, remove dead copper, pour order 22): 105.283,71.755 106.045,70.993 106.426,70.993 106.426,70.104 106.299,69.977 104.648,69.977 104.521,69.977 104.013,70.485 102.489,70.485 102.362,70.612 102.362,71.628 102.489,71.755 105.283,71.755
VREF on Bottom Layer "VREF" (solid, remove dead copper, pour order 24): 113.919,68.707 114.808,68.707 114.935,68.834 115.062,68.961 115.951,68.961 116.84,69.85 117.094,70.104 117.094,70.993 117.094,71.247 118.491,71.247 118.491,73.025 118.364,72.898 116.967,72.898 116.84,72.771 116.84,71.628 116.586,71.374 116.586,71.12 115.951,71.12 115.824,70.993 115.951,71.12 114.935,71.12 114.808,70.993 114.808,70.485 114.808,69.469 114.681,69.342 114.427,69.088 113.919,69.088
SGND on Bottom Layer "SGND" (solid, remove dead copper, pour order 30): 100.711,82.169 101.219,81.661 101.346,81.534 101.346,77.978 101.854,77.47 104.013,77.47 104.521,77.47 104.648,77.47 105.029,77.089 105.156,76.962 105.156,73.787 105.156,73.66 104.775,73.279 102.616,73.279 102.616,72.771 101.854,72.771 101.854,73.279 100.838,73.279 100.457,73.66 100.33,73.787 100.33,77.343 99.695,77.978 99.441,77.978 99.441,82.296 100.711,82.296 101.346,81.661 101.346,81.534
SGND on Top Layer "SGND" (solid, remove dead copper, pour order 32): 105.664,82.296 106.172,81.788 106.172,80.137 105.918,79.883 105.664,79.629 104.14,79.629 102.235,79.629 101.854,80.01 101.854,82.042 102.108,82.296 105.664,82.296
VDD on Top Layer "VDD" (solid, remove dead copper, pour order 14): 98.806,80.137 98.552,80.01 96.774,80.01 96.52,80.137 94.488,80.137 94.488,81.407 94.615,81.534 96.52,81.534 96.52,81.661 96.647,81.788 96.647,82.296 97.282,82.931 97.282,83.185 97.282,83.439 97.536,83.693 97.536,84.709 97.79,84.709 99.568,86.487 100.457,87.376 100.584,87.376 100.584,88.519 101.092,89.027 101.219,89.154 101.473,89.154 101.854,89.535 102.362,89.535 102.743,89.916 102.87,90.043 103.505,90.043 104.013,90.551 104.648,90.551 104.775,90.551 105.029,90.805 113.411,90.805 113.411,90.17 113.919,89.662 114.173,89.662 114.3,89.662 114.427,89.535 114.554,89.408 114.935,89.408 115.951,89.408 116.078,89.281 116.205,89.154 116.205,88.519 116.205,87.249 116.332,87.122 117.094,87.122 117.348,87.122 117.475,86.995 117.475,84.963 117.221,84.709 115.951,84.709 115.57,85.09 113.411,87.249 113.411,87.376 109.474,87.376 109.093,86.995 108.966,86.868 108.966,86.614 101.854,86.614 100.838,85.344 100.711,85.217 100.711,82.296 100.584,82.169 98.933,82.169 98.933,80.264 98.679,80.01
SGND on Top Layer "SGND" (solid, remove dead copper, pour order 16): 94.615,79.756 94.615,79.502 94.615,78.105 94.869,77.851 96.266,77.851 96.52,77.597 96.901,77.216 96.901,76.835 96.901,76.708 97.282,76.2 97.282,76.073 97.282,75.565 97.282,75.438 97.409,75.311 98.044,74.676 100.584,74.676 100.584,75.311 100.965,75.692 104.14,75.819 104.267,75.946 104.267,76.073 104.267,78.105 104.267,78.232 104.013,78.994 101.6,78.994 100.965,79.629 100.965,81.788 100.838,81.915 99.441,81.915 99.187,81.661 99.187,80.137 98.806,79.756
SGND on Top Layer "SGND" (solid, remove dead copper, pour order 18): 103.632,73.787 103.759,73.787 103.886,73.66 103.886,72.898 106.934,69.85 108.331,69.85 108.712,69.469 110.109,69.469 110.871,70.231 114.554,70.231 114.427,69.469 113.411,69.342 113.411,66.675 113.411,65.405 113.665,65.405 109.728,65.405 109.093,65.405 108.077,66.421 107.95,66.548 107.95,68.834 107.823,68.834 107.569,68.961 107.188,69.088 105.029,69.088 104.521,68.453 104.521,67.945 103.632,67.945 103.632,68.58 102.997,68.58 102.743,68.707 102.235,68.58 101.981,69.215 101.981,70.231 101.854,70.358 101.727,70.739 100.838,70.739 100.711,70.739 100.711,71.755 101.092,72.009 101.854,72.009 101.981,72.136 101.981,72.263 101.981,72.517 101.981,73.787
VREF on Top Layer "VREF" (solid, remove dead copper, pour order 26): 101.473,70.358 101.6,70.231 101.727,69.977 101.727,68.453 102.108,68.453 102.108,67.564 102.489,67.183 105.664,67.183 105.664,68.072 105.918,68.326 106.553,68.326 106.553,67.056 106.68,66.929 107.061,66.548 107.315,66.548 107.569,66.548 108.966,65.151 109.22,65.151 113.792,65.151 113.919,65.278 114.046,65.405 114.046,65.913 114.046,68.834 115.062,69.85 115.824,69.85 115.951,69.723 115.951,67.691 115.824,67.691 115.316,67.183 114.935,66.802 114.935,64.389 114.935,64.262 114.554,63.881 107.188,63.881 101.6,63.881 100.711,64.77 100.584,64.897 100.584,70.358

## Silkscreen, mask and mechanical layers (free items; w line width, h text height)
Top Overlay:
  lines w0.254: 109.855,59.182 ccw(c109.855,75.058) 113.964,59.723
  text "VDD" at 96.647,80.391 h0.6
  text "GND" at 96.647,78.359 h0.6
  text "BRA" at 96.774,76.581 h0.6
  text "VSP" at 96.647,74.549 h0.6
  text "DIR" at 96.774,72.771 h0.6
  text "PWM" at 96.647,70.612 h0.6
  text "FG" at 96.774,68.707 h0.6
Bottom Overlay:
  text "B" at 111.125,89.535 h0.51
  text "C" at 99.695,85.852 h0.51
  text "A" at 123.571,81.534 h0.51
Mechanical 1:
  circle w0.203: c109.296,75.438 r3.9
  lines w0.203: 104.469,60.079 cw(c109.296,75.438) 94.428,69.263 94.428,82.578 96.228,81.648 97.333,83.68 96.032,84.564 cw(c109.296,75.438) 98.345,87.24 98.873,86.712 ccw(c99.206,87.044) 99.538,86.712 100.017,87.191 ccw(c99.685,87.523) 100.017,87.856 99.59,88.283 cw(c109.296,75.438) 105.562,91.099 ; 104.469,60.082 114.133,60.082 ccw(c109.296,75.438) 124.626,70.518 124.626,80.399 ; 105.564,91.097 113.97,91.097 113.627,90.056 114.871,89.535 115.188,90.421 cw(c109.296,75.438) 122.623,84.471 121.349,83.795 121.349,83.629 122.187,82.004 122.428,81.978 123.767,82.495 cw(c109.296,75.438) 124.606,80.419 ; 107.975,60.117 107.975,60.833 cw(c108.445,60.833) 108.445,61.303 110.02,61.303 cw(c110.02,60.896) 110.426,60.896 110.426,60.155 ccw(c110.465,60.155) 110.465,60.117 ; 124.583,77.452 cw(c124.269,78.245) 124.626,79.019